# Altium PCB test.PcbDoc
Units mil, origin at the board's own origin, x right, y up, seen from the top; angles counter-clockwise.
Board outline 6000 x 4000 mil, 2 copper layers (Top Layer, Bottom Layer); 23 components, 14 nets, 202 pads, 0 vias.
Unrouted connection lines stored in the file: 51.
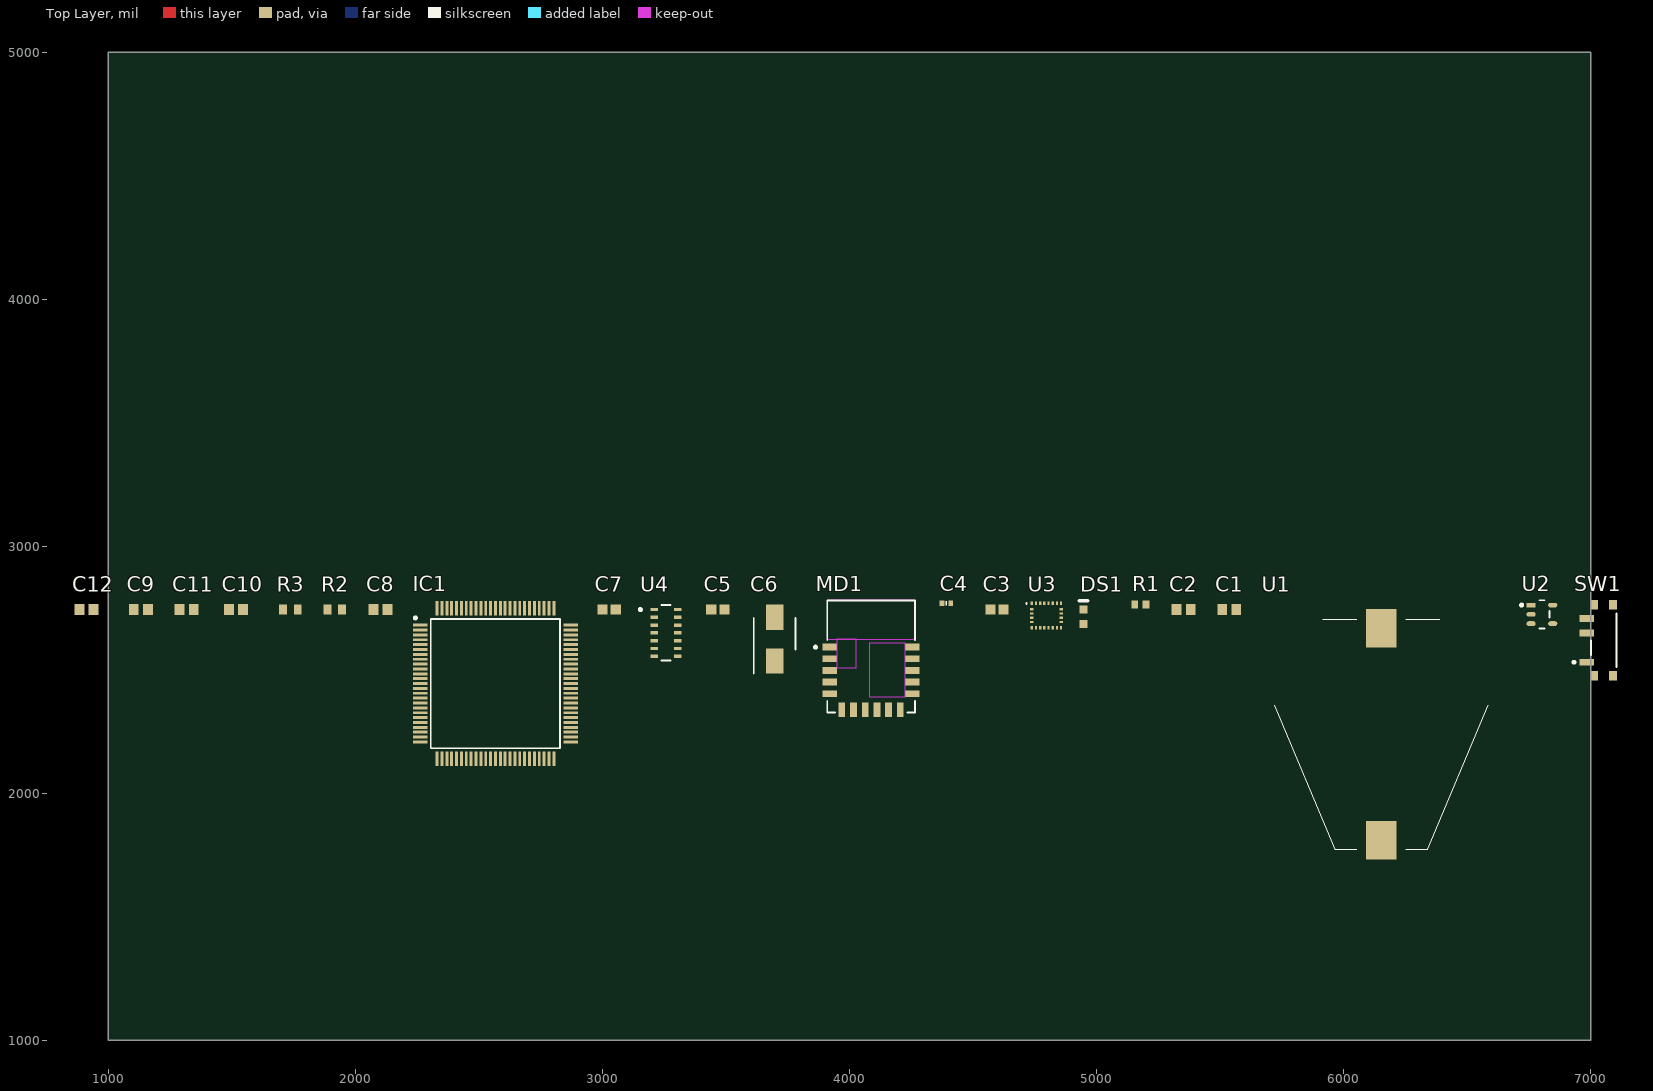
[diagram p0: Top Layer view]
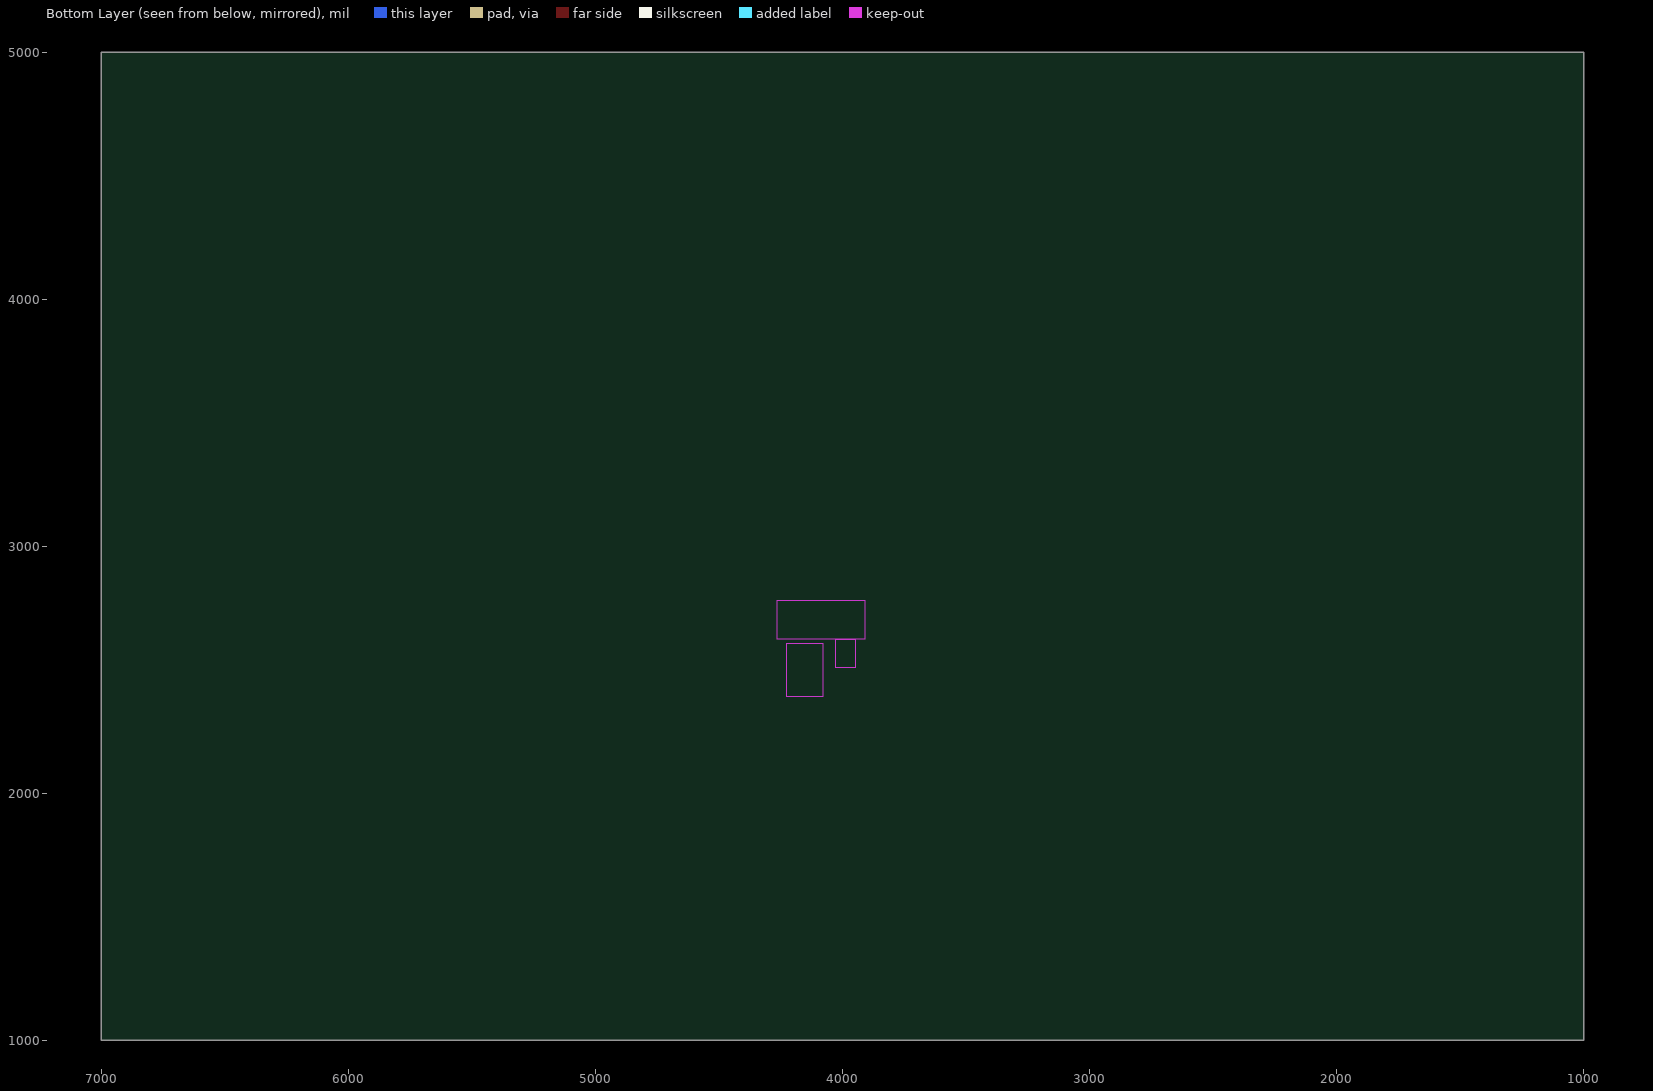
[diagram p1: Bottom Layer view, seen from below]

## Layer stack, top to bottom
Top Solder: solder mask 0.4, Solder Resist, Dk 3.5
Top Layer: signal copper 1.4
Dielectric 1: dielectric 12.6, FR-4, Dk 4.8
Bottom Layer: signal copper 1.4
Bottom Solder: solder mask 0.4, Solder Resist, Dk 3.5

## Board outline
1000,1000 7000,1000 7000,5000 1000,5000

## Design rules (kind name [scope] priority, off if disabled: settings)
Clearance [All] p1: gap=10 ignorepadtopadclearanceinfootprint=FALSE except(0: Arc-Hole Track-Hole SMDPad-Hole THPad-Hole Via-Hole Fill-Hole Poly-Hole Region-Hole Text-Hole)
PolygonConnect [All] p1: connectstyle=Relief reliefconductorwidth=10 reliefentries=4 polygonreliefangle="90 Angle" airgapwidth=10
RoomDefinition schematic [InComponentClass('schematic')] p1: confinementstyle=ConfineIn formatcopy=TRUE lockcomponents=FALSE outline 837.76,1684.49 7157.76,1684.49 7157.76,2894.49 837.76,2894.49
RoutingVias [All] p1: holewidth=28 width=50 viastyle="Through Hole" minholewidth=28 minwidth=50 maxholewidth=28 maxwidth=50
SolderMaskExpansion [All] p1: expansion=4
Width [All] p1: maxlimit=10 minlimit=10 preferedwidth=10
30 further rules are at their usual default settings.

## Components (designator, comment, footprint, x,y, rotation, side; value= is the part's Value field where it differs from the comment)
C1 "Capacitor 1uF +/- 10% 16V 0603" CAPC1608X90X35ML15T15 5537.76,2744.49 r0 top value=1µF
C2 "Capacitor 1uF +/- 10% 16V 0603" CAPC1608X90X35ML15T15 5352.76,2744.49 r0 top value=1µF
C3 "Capacitor 100 nF +/-10% 50 V 0603" CAPC1608X90X40ML10T20 4597.76,2744.49 r0 top value=100nF
C4 "Capacitor 10nF +/-20% 50V 0402" CAPC0402(1005)60_L 4392.76,2769.49 r0 top value=10nF
C5 "Capacitor 100 nF +/-10% 50 V 0603" CAPC1608X90X40ML10T20 3467.76,2744.49 r0 top value=100nF
C6 "EEE1CA100SR" CAPAE430X550N 3697.76,2624.49 r90 top
C7 "Capacitor 100 nF +/-10% 50 V 0603" CAPC1608X90X40ML10T20 3027.76,2744.49 r0 top value=100nF
C8 "Capacitor 1uF +/- 10% 16V 0603" CAPC1608X90X35ML15T15 2102.76,2744.49 r0 top value=1µF
C9 "Capacitor 1uF +/- 10% 16V 0603" CAPC1608X90X35ML15T15 1132.76,2744.49 r0 top value=1µF
C10 "Capacitor 1uF +/- 10% 16V 0603" CAPC1608X90X35ML15T15 1517.76,2744.49 r0 top value=1µF
C11 "Capacitor 1uF +/- 10% 16V 0603" CAPC1608X90X35ML15T15 1317.76,2744.49 r0 top value=1µF
C12 "Capacitor 1uF +/- 10% 16V 0603" CAPC1608X90X35ML15T15 912.76,2744.49 r0 top value=1µF
DS1 "LTST-C190GKT" LTST-C190GKT_V 4947.76,2714.49 r90 top
IC1 "MK20DX128VLL7" QFP50P1600X1600X170-100N 2567.76,2444.49 r0 top
MD1 "RN4871-I/RM130" FP-RN4871-I-RM130-MFG 4087.76,2554.49 r0 top
R1 "CRCW0603560RJNEA" RESC1609X50X30LL10T20 5177.76,2764.49 r0 top
R2 "Resistor 4k7 +/-1% 0603 100 mW" RESC1608X55X25ML10T15 1917.76,2744.49 r0 top value=4.7k
R3 "Resistor 4k7 +/-1% 0603 100 mW" RESC1608X55X25ML10T15 1737.76,2744.49 r0 top value=4.7k
SW1 "PCM12SMTR" CKCP-PCM12SMTR_V 7052.76,2619.49 r90 top
U1 "1062TR" 1062TR 6152.76,2239.49 r0 top
U2 "NCP718ASN330T1G" FP-419AE-01-IPC_C 6802.76,2724.49 r0 top
U3 "LSM9DS1TR" STM-LGA-24_3500X3000X1000 4797.76,2719.49 r0 top
U4 "MAX30101EFD+" FP-F143A5-1-MFG 3257.76,2649.49 r0 top

## Footprints (in the part's own frame and the unit in brackets; to place one, negate y for a bottom-side part, rotate by r counter-clockwise, add the part's x,y. Pads: shape width x height; smd on the part's side, far side on the other; paste and mask are expansions set on the pad)
1062TR [mm]
  rect 3.17x3.96 smd: 1(0,-10.88) 2(0,10.88)
  silkscreen extent -11,-11.83 11,11.83, body extent -1.27,-12.54 1.27,12.54, height 0.1
CAPAE430X550N [mm]
  rect 2.6x1.8 smd: 1(-2.25,0) 2(2.25,0)
  silkscreen extent -3.55,-2.15 2.15,2.15, body extent -2.75,-2.25 2.75,2.25, height 5.5
CAPC0402(1005)60_L [mm] "Chip Capacitor, Body 1.0x0.5mm, Height 0.6mm, IPC High Density"
  rrect25% 0.5x0.55 smd: 1(-0.45,0) 2(0.45,0)
  silkscreen extent 0,-0.2 0,0.2, body extent -0.5,-0.25 0.5,0.25, height 0.6
CAPC1608X90X35ML15T15 [mm] "Chip Capacitor, 2-Leads, Body 1.75x0.95mm, IPC Low Density"
  rect 1x1.1 smd: 1(-0.725,0) 2(0.725,0)
  body extent -0.87,-0.48 0.87,0.48, height 0.9
CAPC1608X90X40ML10T20 [mm] "Chip Capacitor, 2-Leads, Body 1.70x0.90mm, IPC Low Density"
  rect 1.05x1.05 smd: 1(-0.675,0) 2(0.675,0)
  body extent -0.85,-0.45 0.85,0.45, height 0.9
CKCP-PCM12SMTR_V [mm] "SMD, 3-Leads, Body 6.7x2.6mm"
  rect 0.7x1.5 smd: 1(-2.25,1.75) 2(0.75,1.75) 3(2.25,1.75)
  round 0.6 hole 0.9 unplated: MH1(-1.5,0) MH2(1.5,0)
  rect 1x0.8 smd: MP1(-3.65,0.965) MP2(3.65,0.965) MP3(-3.65,-0.965) MP4(3.65,-0.965)
  silkscreen extent -2.75,-1.3 2.75,3.17, body extent -3.68,-2.34 3.67,2.23, height 1.4
FP-419AE-01-IPC_C [mm]
  rect 0.94x0.486 smd paste+0 mask+0: 1(-1.115,0.95)
  rrect100% 0.94x0.486 smd paste+0 mask+0: 2(-1.115,0) 3(-1.115,-0.95) 4(1.116,-0.95) 5(1.116,0.95)
  silkscreen extent -2.21,-1.45 0.8,1.45, body extent -1.69,-1.55 1.69,1.55, height 0.25
FP-F143A5-1-MFG [mm]
  rect 0.75x0.35 smd paste+0 mask+0: 1(-1.2,2.4) 2(-1.2,1.6) 3(-1.2,0.8) 4(-1.2,0) 5(-1.2,-0.8) 6(-1.2,-1.6) 7(-1.2,-2.4) 8(1.2,-2.4) 9(1.2,-1.6) 10(1.2,-0.8) 11(1.2,0) 12(1.2,0.8) 13(1.2,1.6) 14(1.2,2.4)
  silkscreen extent -2.75,-2.85 0.45,2.85, body extent -2.2,-3.35 2.2,3.35, height 0.25
FP-RN4871-I-RM130-MFG [mm]
  rect 1.5x0.7 smd paste+0 mask+0: 1(-4.25,0.95) 2(-4.25,-0.25) 3(-4.25,-1.45) 4(-4.25,-2.65) 5(-4.25,-3.85) 12(4.25,-3.85) 13(4.25,-2.65) 14(4.25,-1.45) 15(4.25,-0.25) 16(4.25,0.95)
  rect 0.7x1.5 smd paste+0 mask+0: 6(-3,-5.5) 7(-1.8,-5.5) 8(-0.6,-5.5) 9(0.6,-5.5) 10(1.8,-5.5) 11(3,-5.5)
  Keep-Out Layer region: -0.2,-4.15 3.5,-4.15 3.5,1.35 -0.2,1.35
  Keep-Out Layer region: -4.5,1.75 4.5,1.75 4.5,5.75 -4.5,5.75
  Keep-Out Layer region: -3.5,-1.15 -1.5,-1.15 -1.5,1.75 -3.5,1.75
  silkscreen extent -5.82,-5.75 4.5,5.75, body extent -5.1,-6.35 5.1,5.85, height 0.25
LTST-C190GKT_V [mm] "SMD, 2-Leads, Body 1.6x0.8mm"
  rect 0.8x0.8 smd: 1(-0.75,0) 2(0.75,0)
  silkscreen extent 1.65,-0.4 1.65,0.4, body extent -0.8,-0.4 0.8,0.4, height 0.9
QFP50P1600X1600X170-100N [mm]
  rect 1.475x0.3 smd: 1(-7.738,6) 2(-7.738,5.5) 3(-7.738,5) 4(-7.738,4.5) 5(-7.738,4) 6(-7.738,3.5) 7(-7.738,3) 8(-7.738,2.5) 9(-7.738,2) 10(-7.738,1.5) 11(-7.738,1) 12(-7.738,0.5) 13(-7.738,0) 14(-7.738,-0.5) 15(-7.738,-1) 16(-7.738,-1.5) 17(-7.738,-2) 18(-7.738,-2.5) 19(-7.738,-3) 20(-7.738,-3.5) 21(-7.738,-4) 22(-7.738,-4.5) 23(-7.738,-5) 24(-7.738,-5.5) 25(-7.738,-6) 51(7.738,-6) 52(7.738,-5.5) 53(7.738,-5) 54(7.738,-4.5) 55(7.738,-4) 56(7.738,-3.5) 57(7.738,-3) 58(7.738,-2.5) 59(7.738,-2) 60(7.738,-1.5) 61(7.738,-1) 62(7.738,-0.5) 63(7.738,0) 64(7.738,0.5) 65(7.738,1) 66(7.738,1.5) 67(7.738,2) 68(7.738,2.5) 69(7.738,3) 70(7.738,3.5) 71(7.738,4) 72(7.738,4.5) 73(7.738,5) 74(7.738,5.5) 75(7.738,6)
  rect 0.3x1.475 smd: 26(-6,-7.738) 27(-5.5,-7.738) 28(-5,-7.738) 29(-4.5,-7.738) 30(-4,-7.738) 31(-3.5,-7.738) 32(-3,-7.738) 33(-2.5,-7.738) 34(-2,-7.738) 35(-1.5,-7.738) 36(-1,-7.738) 37(-0.5,-7.738) 38(0,-7.738) 39(0.5,-7.738) 40(1,-7.738) 41(1.5,-7.738) 42(2,-7.738) 43(2.5,-7.738) 44(3,-7.738) 45(3.5,-7.738) 46(4,-7.738) 47(4.5,-7.738) 48(5,-7.738) 49(5.5,-7.738) 50(6,-7.738) 76(6,7.738) 77(5.5,7.738) 78(5,7.738) 79(4.5,7.738) 80(4,7.738) 81(3.5,7.738) 82(3,7.738) 83(2.5,7.738) 84(2,7.738) 85(1.5,7.738) 86(1,7.738) 87(0.5,7.738) 88(0,7.738) 89(-0.5,7.738) 90(-1,7.738) 91(-1.5,7.738) 92(-2,7.738) 93(-2.5,7.738) 94(-3,7.738) 95(-3.5,7.738) 96(-4,7.738) 97(-4.5,7.738) 98(-5,7.738) 99(-5.5,7.738) 100(-6,7.738)
  silkscreen extent -8.35,-6.65 6.65,6.87, body extent -8,-8 8,8, height 1.7
RESC1608X55X25ML10T15 [mm] "Chip Resistor, 2-Leads, Body 1.70x0.90mm, IPC Low Density"
  rect 0.8x1 smd: 1(-0.75,0) 2(0.75,0)
  body extent -0.85,-0.45 0.85,0.45, height 0.55
RESC1609X50X30LL10T20 [mm] "Chip Resistor, 2-Leads, Body 1.55x0.85mm, IPC High Density"
  rect 0.7x0.85 smd: 1(-0.575,0) 2(0.575,0)
  body extent -0.82,-0.48 0.82,0.48, height 0.5
STM-LGA-24_3500X3000X1000 [mm] "LGA, 24-Leads, Body 3.65x3.15mm, Pitch 0.43mm"
  rect 0.23x0.35 smd mask+0.05: 1(-1.505,1.25) 6(-1.505,-1.25) 7(-1.075,-1.25) 8(-0.645,-1.25) 9(-0.215,-1.25) 10(0.215,-1.25) 11(0.645,-1.25) 12(1.075,-1.25) 13(1.505,-1.25) 18(1.505,1.25) 19(1.075,1.25) 20(0.645,1.25) 21(0.215,1.25) 22(-0.215,1.25) 23(-0.645,1.25) 24(-1.075,1.25)
  rect 0.35x0.23 smd mask+0.05: 2(-1.505,0.645) 3(-1.505,0.215) 4(-1.505,-0.215) 5(-1.505,-0.645) 14(1.505,-0.645) 15(1.505,-0.215) 16(1.505,0.215) 17(1.505,0.645)
  silkscreen extent -2.11,1.19 -1.98,1.31, body extent -1.82,-1.57 1.83,1.58, height 1.03

## Part data
C1 C2 C8 C9 C10 C11 C12: library part CMP-001-00004-4, "Chip Capacitor, 1 uF, +/- 10%, 16 V, 0603 (1608 Metric)", Capacitor Type=Ceramic, Case/Package=0603, Max Operating Temperature=125°C, Min Operating Temperature=-55°C, Tolerance=10%, Voltage Rating=16V, Mounting Technology=SM, Pins=2, RoHS Compliant=True
C3 C5 C7: library part CMP-001-00017-4, "Chip Capacitor, 100 nF, +/- 10%, 50 V, 0603 (1608 Metric)", Capacitor Type=Ceramic, Case/Package=0603, Max Operating Temperature=125°C, Min Operating Temperature=-55°C, Tolerance=10%, Voltage Rating=50V, Mounting Technology=SM, Pins=2, RoHS Compliant=True
C4: library part CMP-001-00069-2, "Chip Capacitor, 10nF +/-20%, 50V, 0402, Thickness 0.6 mm", Case/Package=0402, Max Operating Temperature=85°C, Min Operating Temperature=-55°C, Tolerance=5%, Voltage Rating=50V, Mounting Technology=SMT, Pins=2
C6: "Capacitor Polarised", Manufacturer_Name=Panasonic, Arrow Part Number=EEE1CA100SR, Datasheet Link=https://industrial.panasonic.com/cdbs/www-data/pdf/RDE0000/ABA0000C1145.pdf, Height=5.5mm, Manufacturer_Part_Number=EEE1CA100SR
DS1: library part CMP-007-00022-1, "LED Uni-Color Green, 100 mW, 30 mA, -55 to 85 degC, 2-Pin SMD, RoHS, Tape and Reel", Case/Package=0603, Colour=Green, Forward Current=20mA, Forward Voltage=2.1V, Manufacturer=Lite-On, Max Operating Temperature=85°C, Min Operating Temperature=-55°C, Package Description="2-Pin Surface Mount Device, Body 1.6 x 0.8 mm", Package Quantity=3000, Package Reference=C190GKT, Power=100mW, Datasheet URL=http://datasheet.octopart.com/LTST-C190GKT-Lite-On-datasheet-158530.pdf, Datasheet Version=Dec-06, Illumination Colour=Green, Lens Style=Clear, Luminous Intensity=6mcd, Manufacturer URL=http://www.us.liteon.com/, Mounting Technology=SM, Nominal Vf=2.1V, Packaging=TapeandReel, Pins=2, RoHS Compliant=True, Viewing Angle=130degrees
IC1: "Integrated Circuit", Manufacturer_Name=NXP, Mouser Part Number=841-MK20DX128VLL7, Arrow Part Number=MK20DX128VLL7, Arrow Price/Stock=https://www.arrow.com/en/products/mk20dx128vll7/nxp-semiconductors, Datasheet Link=http://www.nxp.com/docs/en/data-sheet/K20P100M72SF1.pdf, Height=1.7mm, Manufacturer_Part_Number=MK20DX128VLL7, Mouser Price/Stock=https://www.mouser.co.uk/ProductDetail/NXP-Semiconductors/MK20DX128VLL7?qs=WtedIhRlNpuHThscd5qw9w%3D%3D
MD1: library part CMP-06331-000010-1, "BLUETOOTH BLE MODULE, SHIELDED,", Manufacturer=Microchip, Max Frequency=2.48GHz, Max Supply Voltage=3.6V, Min Supply Voltage=1.9V, Nominal Supply Current=80-2230uA, Package=0, Receiving Current=10mA, Temperature="-40°C to +85°C", Temperature Range High=+85°C, Temperature Range Low=-40°C, Automotive=No, Bandwidth=78MHz, Category=UNK, ComponentLink2Description=Datasheet, ComponentLink2URL=http://ww1.microchip.com/downloads/en/DeviceDoc/RN4870-71-Bluetooth-Low-Energy-Module-Data-Sheet-DS50002489D.pdf, Data Rate=10kbits/s, Device Class L1="Integrated Circuits (ICs)", Device Class L2="RF Semiconductors and Devices", Device Class L3=Transceivers, Digikey Description="BLUETOOTH BLE MODULE, SHIELDED,", Height=2.16mm, Interface=I2C,SPI,UART,Other, Lead Free=Yes, Manufacturer Part Number=RN4871-I/RM130, Mouser Description="Bluetooth Ble Module, Shielded, Antenna, Ascii Interface, 9X11.5Mm 16 Module 11.5X9x2.1 Mm Tray", Number Of Gpio=4, Octopart=https://octopart.com/rn4871-i%2Frm130-microchip-92006868, RoHS=TRUE, Sensitivity=-90dBm, Transmitting Current=10mA
R1: library part CMP-2000-03464-1, Manufacturer="Vishay Dale", Part Number=CRCW0603560RJNEA
R2 R3: library part CMP-009-00031-4, "Chip Resistor, 4.7 KOhm, +/- 1%, 0.1 W, -55 to 155 degC, 0603 (1608 Metric)", Case/Package=0603, Max Operating Temperature=155°C, Min Operating Temperature=-55°C, Power=100mW, Tolerance=1%, Mounting Technology=SM, Pins=2, RoHS Compliant=True
SW1: library part CMP-2000-06884-1, "Ultraminiature Slide Switch, SPDT, 0.3 A, 6 V, -20 to 85 degC, 3-Pin SMD, RoHS, Tape and Reel", Contact Current-Max=0.3A, Manufacturer="C&K Components", Package Description="3-Pin Surface Mount Device, Body 6.7 x 2.6 mm", Circuitry=SPDT, Contact Material=SilverOverCopper, Datasheet URL=http://www.ck-components.com/media/1424/pcm.pdf, Datasheet Version=02/2016, Manufacturer URL=http://www.ckswitches.com/, Mounting Technology=SurfaceMount, Package Reference=PCM12SMTR, Switch Operation=On-On, Termination Style=RightAngle/SurfaceMount
U1: "Undefined or Miscellaneous", Manufacturer_Name="Keystone Electronics", Mouser Part Number=534-1062TR, Arrow Part Number=1062TR, Datasheet Link=https://www.keyelco.com/product-pdf.cfm?p=3849, Height=10.31mm, Manufacturer_Part_Number=1062TR, Mouser Price/Stock=https://www.mouser.co.uk/ProductDetail/Keystone-Electronics/1062TR?qs=%252BeqmunvUw%2FWNoGZeA9V7vw%3D%3D
U2: library part CMP-07128-000009-1, "300 MA LOW IQ WIDE INPUT", Dropout Voltage=275mV, Manufacturer="ON Semiconductor", Max Junction Temp=+150°C, Max Supply Voltage=24V, Min Supply Voltage=2.5V, Nominal Supply Current=4uA, Output Current=800mA, Output Voltage=3.3V, Package=419AE-01, Temperature="to +150°C", Accuracy Percentage=2%, Automotive=No, Category=IC, ComponentLink2Description=Datasheet, ComponentLink2URL=https://www.onsemi.com/pub/Collateral/NCP718-D.PDF, Device Class L1="Integrated Circuits (ICs)", Device Class L2="Power Management ICs", Device Class L3="Voltage Regulators - Linear", Digikey Description="300 MA LOW IQ WIDE INPUT", Footprint Url=https://www.onsemi.com/pub/Collateral/419AE.PDF, Height=1mm, Ipc Land Pattern Name=SOT95P280X100-5, Lead Free=Yes, Manufacturer Part Number=NCP718ASN330T1G, Mouser Description="LDO Regulator, 300 mA, Wide Vin, Ultra-Low Iq Fixed 3.3V, Active Discharge, TSOT23-5", Number Of Outputs=1, Octopart=https://octopart.com/ncp718asn330t1g-on+semiconductor-87658778, Output Type=Fixed, RoHS=TRUE, Standoff Height=0.01mm, Temperature Range High=+150°C
U3: library part CMP-2000-06606-1, "iNEMO Inertial Module: 3D Accelerometer, 3D Gyroscope, 3D Magnetometer, 1.9 to 3.6 V, -40 to 85 degC, 24-Pin LGA, RoHS, Tape and Reel", Manufacturer=STMicroelectronics, Package Description="24-Pin Plastic Land Grid Array Package, Body 3.65 x 3.15 mm, Pitch 0.43 mm", Package Reference=LGA-24_3500X3000X1000, PartNumber=LSM9DS1, Sensor Case Style=LGA, Supply Voltage Max=3.6V, Supply Voltage Min=1.9V, Acceleration Range=±2g,±4g,±8g,±16g, Datasheet URL=http://www2.st.com/content/ccc/resource/technical/document/datasheet/1e/3f/2a/d6/25/eb/48/46/DM00103319.pdf/files/DM00103319.pdf/jcr:content/translations/en.DM00103319.pdf, Datasheet Version="Rev. 3, 03/2015", Gyroscope Range=±245°/s,±500°/s,±2000°/s, Manufacturer URL=http://www.st.com/, MEMS Module Function=Tri-AxisGyroscope,Tri-AxisAccelerometer,Tri-AxisMagnetometer, Mounting Technology=SurfaceMount, MSL=MSL3-168hours, No. of Pins=24Pins, Packaging=CutTape, Product Range=-, SVHC=NoSVHC(17-Dec-2015)
U4: library part CMP-05738-000001-1, "INTEGRATED OPTICAL SENSOR", Manufacturer="Maxim Integrated", Max Junction Temp=+90°C, Max Supply Voltage=2V, Min Supply Voltage=1.7V, Operating Supply Current=600uA, Package=F143A5-1, Temperature="-40°C to +85°C", Temperature Range High=+85°C, Temperature Range Low=-40°C, Automotive=No, Category=IC, ComponentLink2Description=Datasheet, ComponentLink2URL=https://datasheets.maximintegrated.com/en/ds/MAX30101.pdf, Device Class L1=Sensors, Device Class L2=unset, Device Class L3=unset, Digikey Description="INTEGRATED OPTICAL SENSOR", Footprint Url=https://pdfserv.maximintegrated.com/land_patterns/90-0602.PDF, Height=1.65mm, Lead Free=Yes, Manufacturer Part Number=MAX30101EFD+, Mouser Description="INTEGRATED OPTICAL SENSOR", Octopart=https://octopart.com/max30101efd%2B-maxim+integrated-57054333, RoHS=TRUE, Sensor Output=I2C

## Nets (pads, with @x,y where several pads share a name; then routed paths per layer and width w, separated by ;. In a path a pad name is that pad's centre, name@x,y a point inside that pad or via, vN(x,y) a via of type N, cw(c..) or ccw(c..) an arc to the next point about the centre after c; other vN are vias at no path point)
3V3: C1.1 C5.2 C6.1 C7.1 IC1.8 IC1.48 IC1.61 IC1.75 IC1.89 R2.1 R3.1 U2.5 U3.1 U3.3 U3.5 U3.6 U3.7 U3.8 U3.22 U3.23
GND: C1.2 C2.2 C3.1 C4.1 C5.1 C7.2 DS1.2 U1.2 U2.2 U3.14 U3.15 U3.16 U3.17 U3.18 U3.19 U3.20
INT1_A/G: IC1.78 U3.11
INT2_A/G: IC1.83 U3.12
INT_M: IC1.81 U3.10
NetC2_1: C2.1 R1.2 SW1.3 U2.1
NetC3_2: C3.2 U3.24
NetC4_2: C4.2 U3.21
NetC9_2: C9.2 C10.1 C11.1
NetC10_2: C10.2 C11.2
NetDS1_1: DS1.1 R1.1
NetSW1_2: SW1.2 U1.1
SCL: IC1.55 R2.2 U3.2
SDA: IC1.54 R3.2 U3.4
pads on no net: C6.2 C8.1 C8.2 C9.1 C12.1 C12.2 IC1.1 IC1.2 IC1.3 IC1.4 IC1.5 IC1.6 IC1.7 IC1.9 IC1.10 IC1.11 IC1.12 IC1.13 IC1.14 IC1.15 IC1.16 IC1.17 IC1.18 IC1.19 IC1.20 IC1.21 IC1.22 IC1.23 IC1.24 IC1.25 IC1.26 IC1.27 IC1.28 IC1.29 IC1.30 IC1.31 IC1.32 IC1.33 IC1.34 IC1.35 IC1.36 IC1.37 IC1.38 IC1.39 IC1.40 IC1.41 IC1.42 IC1.43 IC1.44 IC1.45 IC1.46 IC1.47 IC1.49 IC1.50 IC1.51 IC1.52 IC1.53 IC1.56 IC1.57 IC1.58 IC1.59 IC1.60 IC1.62 IC1.63 IC1.64 IC1.65 IC1.66 IC1.67 IC1.68 IC1.69 IC1.70 IC1.71 IC1.72 IC1.73 IC1.74 IC1.76 IC1.77 IC1.79 IC1.80 IC1.82 IC1.84 IC1.85 IC1.86 IC1.87 IC1.88 IC1.90 IC1.91 IC1.92 IC1.93 IC1.94 IC1.95 IC1.96 IC1.97 IC1.98 IC1.99 IC1.100 MD1.1 MD1.2 MD1.3 MD1.4 MD1.5 MD1.6 MD1.7 MD1.8 MD1.9 MD1.10 MD1.11 MD1.12 MD1.13 MD1.14 MD1.15 MD1.16 SW1.1 SW1.MH1 SW1.MH2 SW1.MP1 SW1.MP2 SW1.MP3 SW1.MP4 U2.3 U2.4 U3.9 U3.13 U4.1 U4.2 U4.3 U4.4 U4.5 U4.6 U4.7 U4.8 U4.9 U4.10 U4.11 U4.12 U4.13 U4.14